# Altium PCB 无线小样.PcbDoc
Units mm, origin at the board's own origin, x right, y up, seen from the top; angles counter-clockwise.
Board outline 31.75 x 22.48 mm, 4 copper layers (Top Layer, VCC, GND, Bottom Layer), stack 0.778 mm thick; 43 components, 30 nets, 165 pads, 43 vias.
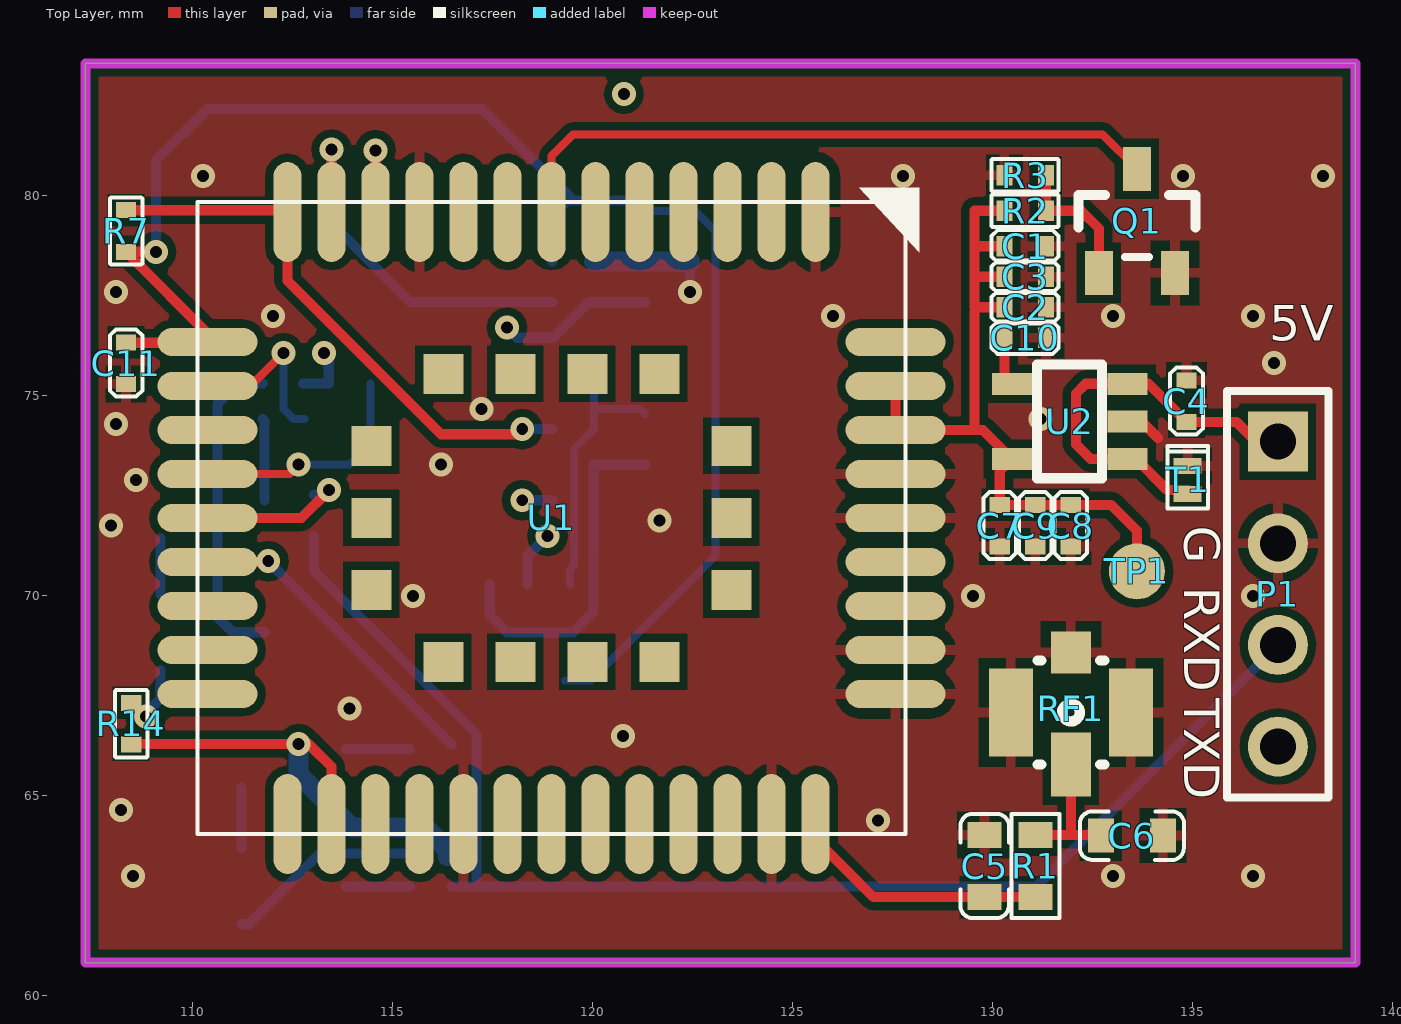
[diagram p0: Top Layer view]
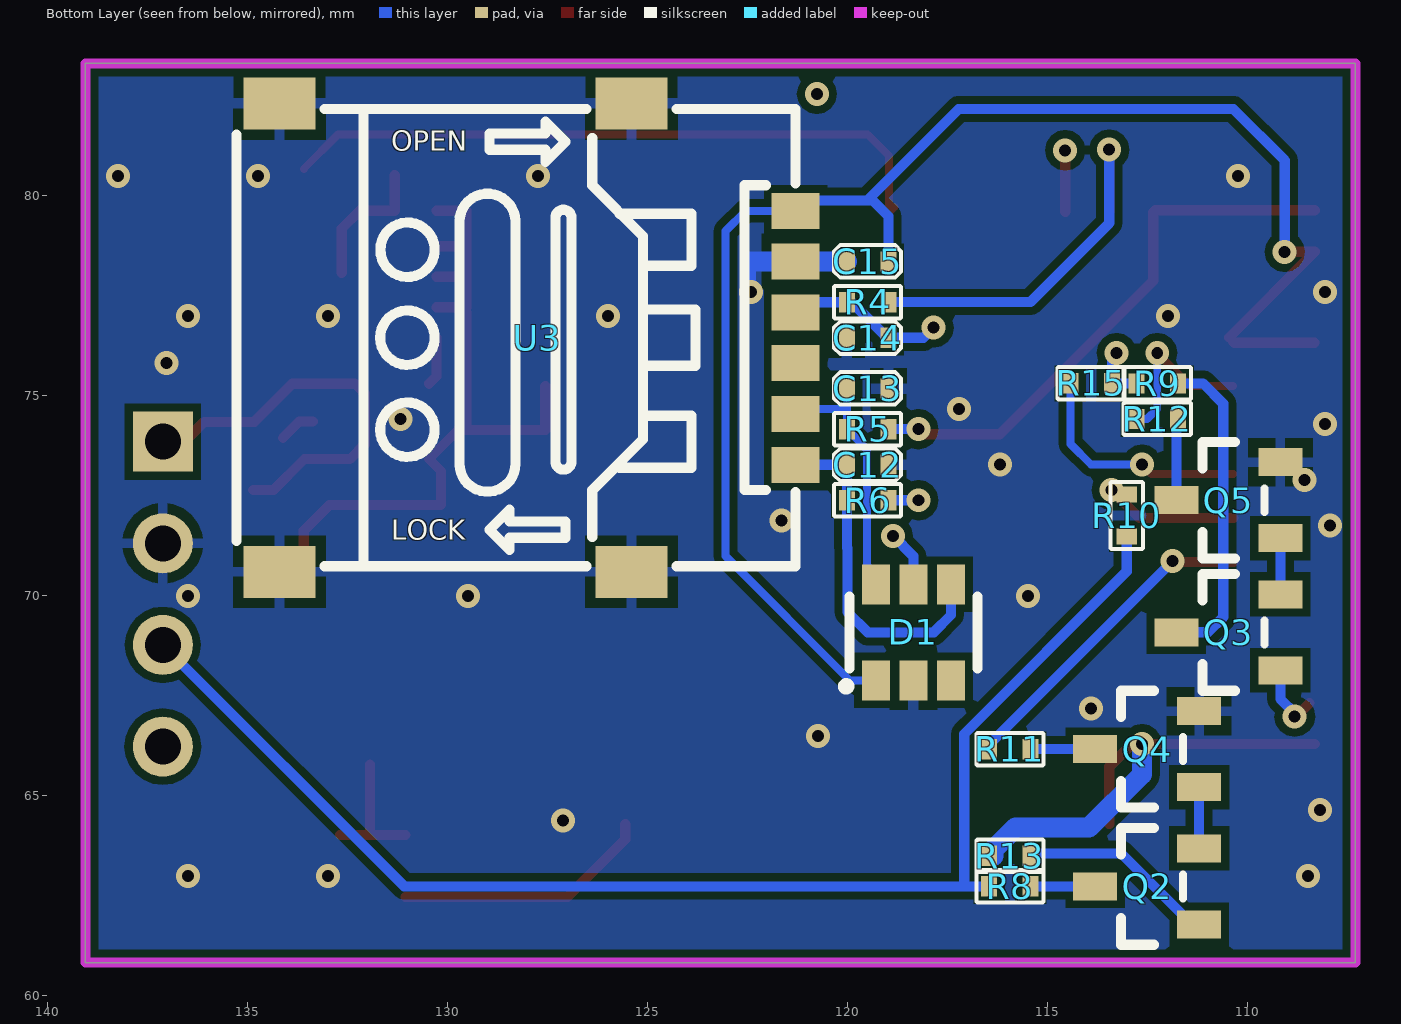
[diagram p1: Bottom Layer view, seen from below]
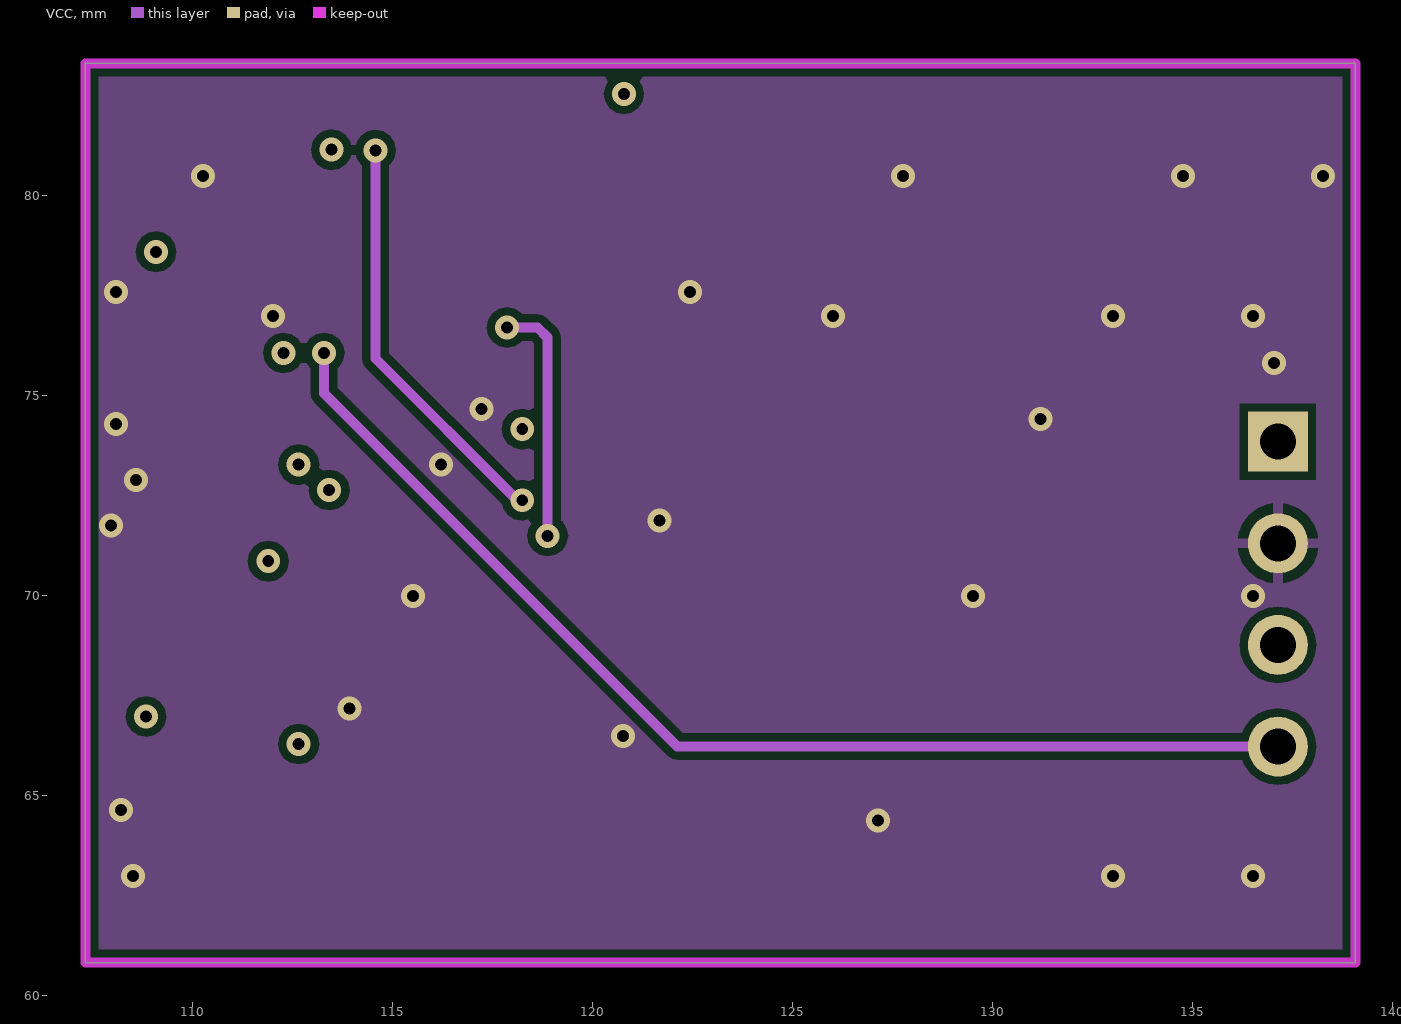
[diagram p2: VCC]
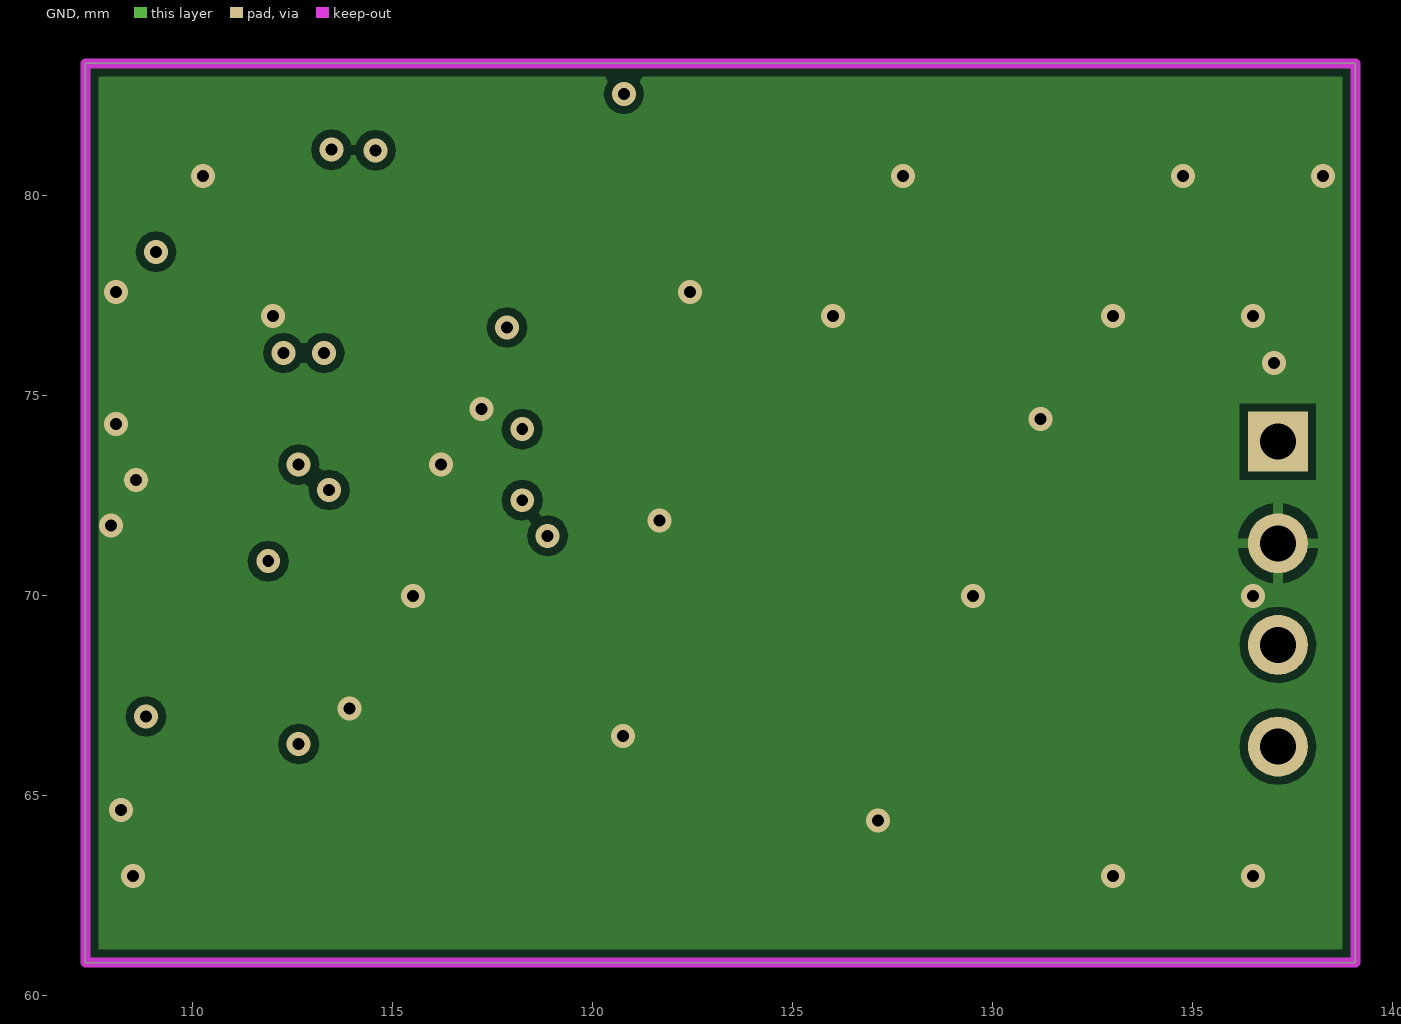
[diagram p3: GND]
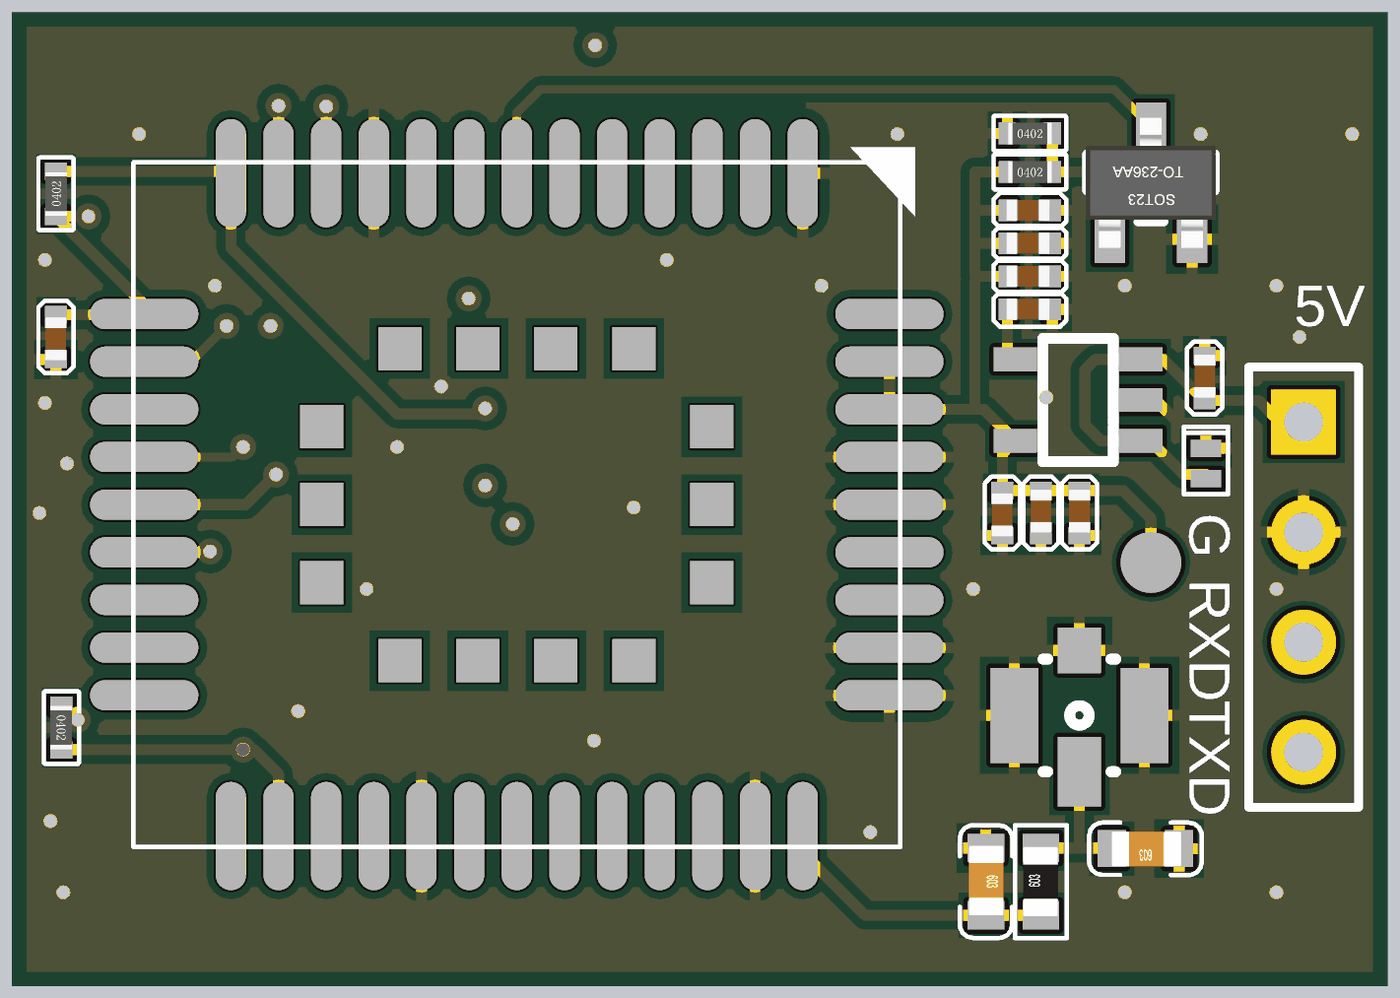
[diagram p4: 3D render of the assembled board from above, using the file's embedded part models]
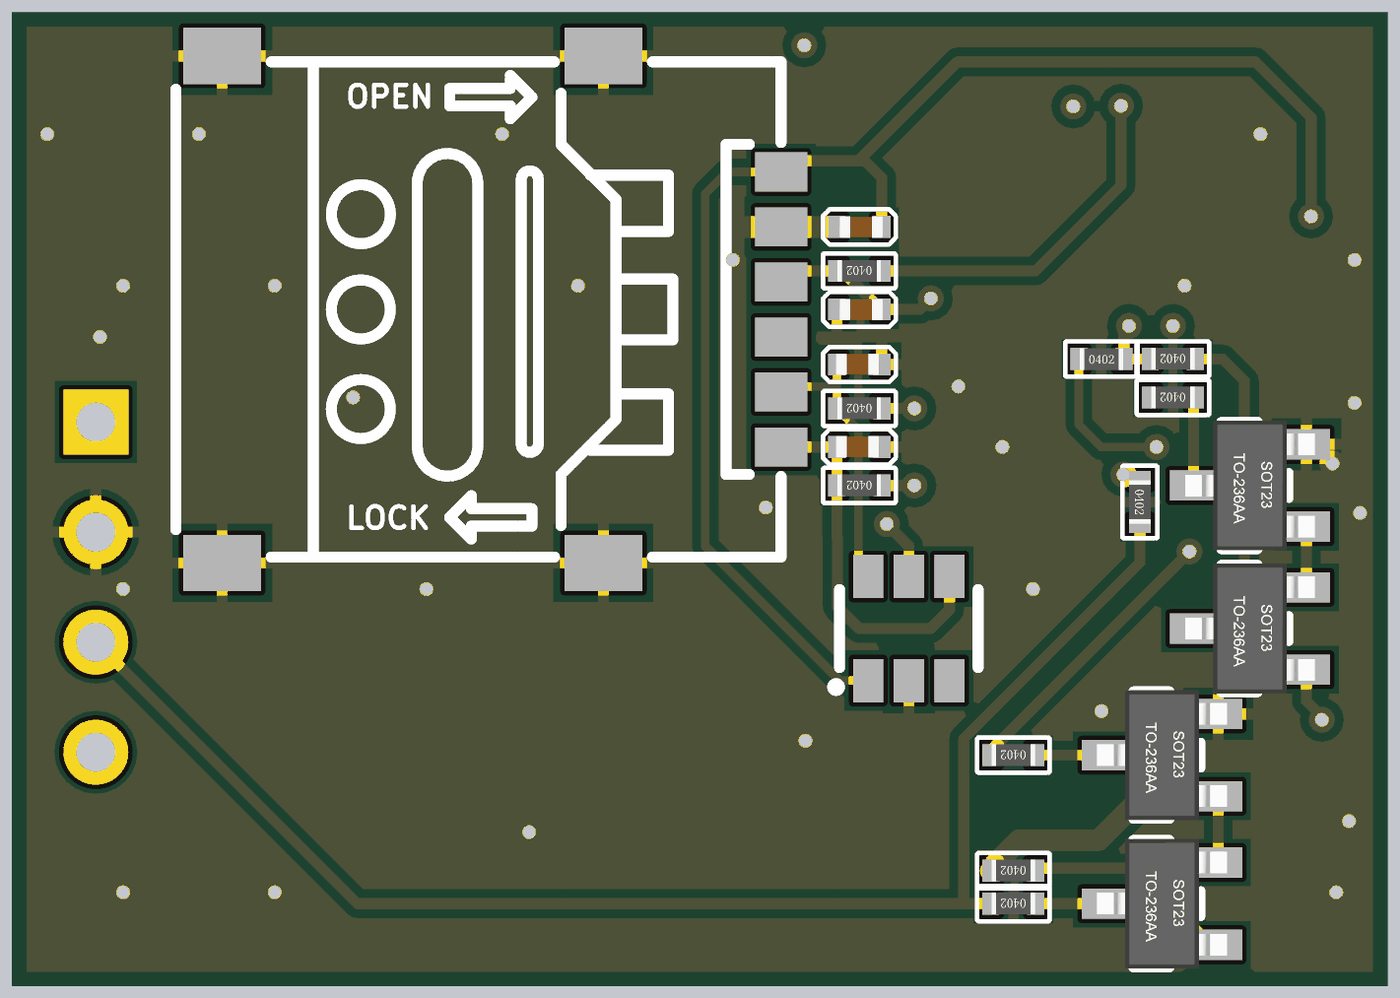
[diagram p5: 3D render of the assembled board from below, using the file's embedded part models]

## Layer stack, top to bottom
Top Solder: solder mask 0.0102, Solder Resist, Dk 3.5
Top Layer: signal copper 0.0356
Dielectric 1: core 0.254, FR-4, Dk 4.2
VCC: signal copper 0.036
Dielectric 3: prepreg 0.127, Dk 4.2
GND: signal copper 0.036
Dielectric 2: core 0.254, Dk 4.2
Bottom Layer: signal copper 0.0356
Bottom Solder: solder mask 0.0102, Solder Resist, Dk 3.5

## Board outline
107.315,60.833 107.315,83.312 139.065,83.312 139.065,60.833

## Design rules (kind name [scope] priority, off if disabled: settings)
Clearance [All] p1: gap=0.2
PolygonConnect PolygonConnect_1 [Isvia] p1: connectstyle=Direct reliefconductorwidth=0.254 reliefentries=4 polygonreliefangle="90 Angle" airgapwidth=0.254
PolygonConnect [All] p2: connectstyle=Relief reliefconductorwidth=0.254 reliefentries=4 polygonreliefangle="90 Angle" airgapwidth=0.254
RoutingVias [All] p1: holewidth=0.711 width=1.27 viastyle="Through Hole" minholewidth=0.711 minwidth=1.27 maxholewidth=0.711 maxwidth=1.27
SolderMaskExpansion [All] p1: expansion=0.102
Width [All] p1: maxlimit=5 minlimit=0.2 preferedwidth=0.254
30 further rules are at their usual default settings.

## Components (designator, comment, footprint, x,y, rotation, side; value= is the part's Value field where it differs from the comment)
C1 "100nF" 0402C 130.81,78.74 r180 top
C2 "100pF" 0402C 130.81,77.216 r180 top
C3 "22pF" 0402C 130.81,77.978 r180 top
C4 "100nF" 0402C 134.843,74.869 r90 top
C5 "NC" 0603C 129.794,63.246 r270 top
C6 "NC" 0603C 133.477,64.008 r180 top
C7 "47uF/6.3V/Tan" 0402C 130.175,71.755 r270 top
C8 "100nF" 0402C 131.953,71.755 r90 top
C9 "22pF" 0402C 131.064,71.755 r90 top
C10 "100nF" 0402C 130.81,76.454 r180 top
C11 "100nF" 0402C 108.331,75.819 r270 top
C12 "33pF" 0402C 119.507,73.279 r0 bottom
C13 "33pF" 0402C 119.507,75.184 r0 bottom
C14 "33pF" 0402C 119.507,76.454 r180 bottom
C15 "33pF" 0402C 119.507,78.359 r180 bottom
D1 "SMS05CT1G" TSOP-6_L3.0-W1.5-P0.95-LS2.8-BL 118.364,69.088 r180 bottom
P1 "接口" HDR1X4 137.129,73.853 r270 top
Q1 "S8050-J3Y" SOT23 133.604,79.375 r270 top
Q2 "S8050-J3Y" SOT23 112.522,62.738 r180 bottom
Q3 "S8050-J3Y" SOT23 110.49,69.088 r180 bottom
Q4 "S8050-J3Y" SOT23 112.522,66.167 r180 bottom
Q5 "S8050-J3Y" SOT23 110.49,72.39 r180 bottom
R1 "0R" 0603R 131.064,63.246 r90 top
R2 "4.7K" 0402R 130.81,79.629 r0 top
R3 "47K" 0402R 130.81,80.518 r0 top
R4 "22R" 0402R 119.507,77.343 r0 bottom
R5 "22R" 0402R 119.507,74.168 r0 bottom
R6 "22R" 0402R 119.507,72.39 r0 bottom
R7 "10K" 0402R 108.331,79.121 r90 top
R8 "4.7K" 0402R 115.951,62.738 r0 bottom
R9 "4.7K" 0402R 112.268,75.311 r0 bottom
R10 "0R" 0402R 113.03,72.009 r270 bottom
R11 "1K" 0402R 115.951,66.167 r0 bottom
R12 "1K" 0402R 112.268,74.422 r0 bottom
R13 "4.7K" 0402R 115.951,63.5 r0 bottom
R14 "4.7K" 0402R 108.458,66.802 r270 top
R15 "0R" 0402R 113.919,75.311 r180 bottom
RF1 "73412-0110" ANT-SMD_73412-0110 131.953,67.183 r0 top
T1 "PESD12VV1BL-N" X1-DFN1006-2_L1.0-W0.6-RD 134.874,72.898 r270 top
TP1 "Testpoint" TP 133.604,70.612 r0 top
U1 "BC26" BC26 118.968,71.948 r270 top
U2 "LP2985-33DBVR" SOT-23-5 131.922,74.361 r90 top
U3 "Nano_sim" SIM-SMD_C77877 127.762,76.454 r180 bottom

## Footprints (in the part's own frame and the unit in brackets; to place one, negate y for a bottom-side part, rotate by r counter-clockwise, add the part's x,y. Pads: shape width x height; smd on the part's side, far side on the other; paste and mask are expansions set on the pad)
0402C [mm]
  rect 0.4x0.508 smd: 1(-0.52,0) 2(0.52,0)
  silkscreen extent -0.84,-0.41 0.84,0.41, body extent -0.46,-0.25 0.54,0.25, height 0.5
0402R [mm]
  rect 0.4x0.508 smd: 1(-0.52,0) 2(0.52,0)
  silkscreen extent -0.84,-0.41 0.84,0.41, body extent -0.5,-0.25 0.5,0.25, height 0.35
0603C [mm]
  rect 0.65x0.85 smd: 1(-0.776,0) 2(0.776,0)
  silkscreen extent -1.3,-0.6 1.3,0.61, body extent -0.83,-0.39 0.77,0.41, height 0.3
0603R [mm]
  rect 0.65x0.85 smd: 1(-0.776,0) 2(0.776,0)
  silkscreen extent -1.3,-0.6 1.3,0.6, body extent -0.8,-0.39 0.8,0.41, height 0.3
ANT-SMD_73412-0110 [mm]
  rect 1.1x2.2 smd: 1(-1.5,-0.1) 3(1.5,-0.1)
  rect 1x1.6 smd: 2(0,-1.4)
  rect 1x1.05 smd: 4(0,1.4)
  silkscreen extent -0.84,-1.4 0.84,1.2
BC26 [mm]
  oval 2.5x0.7 smd mask+0.05: 1(-7.65,6.6) 2(-7.65,5.5) 3(-7.65,4.4) 4(-7.65,3.3) 5(-7.65,2.2) 6(-7.65,1.1) 7(-7.65,0) 8(-7.65,-1.1) 9(-7.65,-2.2) 10(-7.65,-3.3) 11(-7.65,-4.4) 12(-7.65,-5.5) 13(-7.65,-6.6) 23(7.65,-6.6) 24(7.65,-5.5) 25(7.65,-4.4) 26(7.65,-3.3) 27(7.65,-2.2) 28(7.65,-1.1) 29(7.65,0) 30(7.65,1.1) 31(7.65,2.2) 32(7.65,3.3) 33(7.65,4.4) 34(7.65,5.5) 35(7.65,6.6)
  oval 0.7x2.5 smd mask+0.05: 14(-4.4,-8.6) 15(-3.3,-8.6) 16(-2.2,-8.6) 17(-1.1,-8.6) 18(0,-8.6) 19(1.1,-8.6) 20(2.2,-8.6) 21(3.3,-8.6) 22(4.4,-8.6) 36(4.4,8.6) 37(3.3,8.6) 38(2.2,8.6) 39(1.1,8.6) 40(0,8.6) 41(-1.1,8.6) 42(-2.2,8.6) 43(-3.3,8.6) 44(-4.4,8.6)
  rect 1x1 smd mask+0.05: 45(-3.6,2.7) 46(-3.6,0.9) 47(-3.6,-0.9) 48(-3.6,-2.7) 49(-1.8,-4.5) 50(0,-4.5) 51(1.8,-4.5) 52(3.6,-2.7) 53(3.6,-0.9) 54(3.6,0.9) 55(3.6,2.7) 56(1.8,4.5) 57(0,4.5) 58(-1.8,4.5)
  silkscreen extent -8.25,-8.85 7.9,9.2
HDR1X4 [mm] "Connector; Header; 4 Position"
  rect 1.5x1.5 hole 0.9: 1(0,0)
  round 1.5 hole 0.9: 2(2.54,0) 3(5.08,0) 4(7.62,0)
  silkscreen extent -1.27,-1.27 8.89,1.27
SIM-SMD_C77877 [mm]
  rect 1.8x1.3 smd: 0(-6.451,-5.853) 0(-6.451,5.853) 0(2.349,-5.853) 0(2.349,5.853)
  rect 1.2x0.9 smd: 1(6.451,3.173) 2(6.451,0.633) 3(6.451,-1.907) 5(6.451,1.903) 6(6.451,-0.637) 7(6.451,-3.177)
  silkscreen extent -7.52,-5.72 6.45,5.72
SOT23 [mm]
  rect 1.1x0.7 smd: 1(1.301,-0.95) 2(1.301,0.95) 3(-1.301,0)
  silkscreen extent -0.65,-1.46 0.9,1.46, body extent -1.5,-1.5 1.5,1.5, height 1.3
SOT-23-5 [mm]
  rect 0.551x1 smd: 1(-0.94,-1.448) 2(0,-1.448) 3(0.94,-1.448) 4(0.94,1.448) 5(-0.94,1.448)
  silkscreen extent -1.42,-0.81 1.42,0.81
TP [mm]
  round 1.4 smd: 1(0,0)
TSOP-6_L3.0-W1.5-P0.95-LS2.8-BL [mm]
  rect 0.7x1 smd: 1(-0.94,-1.2) 2(0,-1.2) 3(0.94,-1.2) 4(0.94,1.2) 5(0,1.2) 6(-0.94,1.2)
  silkscreen extent -1.76,-1.43 1.6,0.9
X1-DFN1006-2_L1.0-W0.6-RD [mm]
  rect 0.4x0.7 smd: 1(-0.35,0) 2(0.35,0)
  silkscreen extent -0.85,-0.51 0.71,0.51

## Part data
C1 C2 C3 C4 C5 C6 C8 C9 C10 C11 C12 C13 C14 C15: library part Cap, "Capacitor"
C7: library part "Cap Pol1", "Polarized Capacitor (Radial)"
P1: library part "Header 4", "Header, 4-Pin"
R1 R2 R3 R4 R5 R6 R7 R8 R9 R10 R11 R12 R13 R14 R15: library part Res1, "Resistor"
T1: library part TVS2
U2: library part SGM2019

## Via types
v1: diameter 0.6, hole 0.3, Top Layer to Bottom Layer, tented both sides, 43 vias

## Nets (pads, with @x,y where several pads share a name; then routed paths per layer and width w, separated by ;. In a path a pad name is that pad's centre, name@x,y a point inside that pad or via, vN(x,y) a via of type N, cw(c..) or ccw(c..) an arc to the next point about the centre after c; other vN are vias at no path point)
D_5V: C4.1 P1.1 T1.2 U2.1 U2.3 | length 10.3
  Top Layer w0.254: T1.2@134.874,72.644 134.366,72.644 133.589,73.421 U2.1 132.446,73.421 132.08,73.787 132.08,75.057 132.324,75.301 U2.3 133.891,75.301 C4.1 136.09,74.349 136.586,73.853 P1.1
GND: C1.1 C2.1 C3.1 C4.2 C5.1 C6.1 C7.2 C8.1 C9.1 C10.1 C11.2 C12.1 C13.1 C14.1 C15.1 D1.2 P1.2 Q1.2 Q4.2 Q5.2 R3.1 RF1.1 RF1.3 RF1.4 T1.1 U1.1 U1.10 U1.27 U1.34 U1.36 U1.37 U1.40 U1.41 U2.2 U3.0 U3.5 | length 4.1
  Top Layer w0.254: U2.2 133.712,74.361 134.124,73.949
  Bottom Layer w0.254: v1(122.428,77.597) 122.428,78.357
  Bottom Layer w0.5: C15.1@120.027,78.357 120.348,78.357 120.99,78.357 U3.5 122.428,78.357
  other v1: 108.5,63 133,63 136.5,63 127.127,64.389 108.204,64.643 120.75,66.5 113.919,67.183 115.5,70 129.5,70 136.5,70 107.95,71.755 121.666,71.882 108.585,72.898 116.205,73.279 108.077,74.295 131.191,74.422 117.221,74.676 137.033,75.819 112,77 126,77 133,77 136.5,77 108.077,77.597 110.25,80.5 127.75,80.5 134.75,80.5 138.25,80.5
NetC5_2: C5.2 R1.1 U1.35 | length 6.5
  Top Layer w0.254: U1.35 125.568,63.916 127.014,62.47 C5.2 R1.1
NetC10_2: C10.2 U2.4 | length 1.2
  Top Layer w0.254: C10.2 130.29,75.485 U2.4
NetC12_2: C12.2 D1.4 R6.2 U3.7 | length 10.9
  Bottom Layer w0.254: D1.4 117.424,69.52 117.856,69.088 119.507,69.088 120.015,69.596 120.015,71.192 120.026,71.203 120.026,73.277 U3.7 121.31,73.279 C12.2 R6.2
NetC13_2: C13.2 D1.6 R5.2 U3.3 | length 6.4
  Bottom Layer w0.2: D1.6@119.431,70.288 119.431,70.663 119.527,70.759 119.527,73.657 119.599,73.729 119.599,73.74 R5.2 120.027,74.676 ; C13.2@120.027,75.057 120.027,74.676 ; U3.3 121.183,74.676 120.027,74.676
NetC14_2: C14.2 D1.5 R4.2 U3.2 | length 11.4
  VCC w0.254: v1(117.856,76.708) 118.618,76.708 118.872,76.454 v1(118.872,71.501)
  Bottom Layer w0.254: v1(117.856,76.708) 118.11,76.454 C14.2 119.014,76.454 119.902,77.341 U3.2@121.311,77.341 ; D1.5 118.364,70.993 v1(118.872,71.501)
NetQ1_1: Q1.1 R2.2 R3.2 | length 3.5
  Top Layer w0.254: R3.2 R2.2 132.207,79.629 132.654,79.182 Q1.1
NetQ1_3: Q1.3 U1.7 | length 16.8
  Top Layer w0.2: U1.7@118.841,79.725 U1.7 118.968,80.995 119.507,81.534 132.746,81.534 Q1.3
NetQ2_1: Q2.1 R13.1 | length 5
  Bottom Layer w0.254: Q2.1 111.399,61.788 113.169,63.558 115.373,63.558 R13.1
NetQ2_2: Q2.2 Q4.1 | length 1.5
  Bottom Layer w0.254: Q2.2 Q4.1
NetQ2_3: Q2.3 R8.1 | length 1.6
  Bottom Layer w0.254: Q2.3 R8.1
NetQ3_1: Q3.1 R14.1 | length 1.9
  Top Layer w0.254: R14.1 108.832,66.948 v1(108.832,66.982)
  Bottom Layer w0.254: v1(108.832,66.982) 108.832,67.063 109.189,67.42 Q3.1
NetQ3_2: Q3.2 Q5.1 | length 1.4
  Bottom Layer w0.254: Q3.2 Q5.1
NetQ3_3: Q3.3 R9.1 | length 8
  Bottom Layer w0.254: R9.1 111.125,75.311 110.617,74.803 110.617,69.469 110.998,69.088 Q3.3
NetQ4_3: Q4.3 R11.1 | length 1.6
  Bottom Layer w0.254: Q4.3 R11.1
NetQ5_3: Q5.3 R12.1 | length 2
  Bottom Layer w0.254: R12.1 111.791,74.379 Q5.3
NetR10_1: R10.1 U1.18 | length 3.8
  Top Layer w0.254: U1.18 112.715,71.948 v1(113.411,72.644)
  Bottom Layer w0.254: R10.1 113.296,72.529 v1(113.411,72.644)
NetR15_1: R15.1 U1.17 | length 5.9
  Top Layer w0.2: U1.17 112.418,73.048 v1(112.649,73.279)
  Bottom Layer w0.2: v1(112.649,73.279) 113.919,73.279 114.439,73.799 R15.1
PSM_EINT: R11.2 U1.19 | length 8
  Top Layer w0.254: U1.19@110.35,70.866 U1.19 111.869,70.848 v1(111.887,70.866)
  Bottom Layer w0.254: v1(111.887,70.866) R11.2@116.471,66.282
RESET: R12.2 U1.15 | length 4.3
  Top Layer w0.2: U1.15 111.443,75.248 v1(112.268,76.073)
  Bottom Layer w0.2: v1(112.268,76.073) 112.268,74.676 112.522,74.422 R12.2
RF: C6.2 R1.2 RF1.2 | length 3.4
  Top Layer w0.254: R1.2 131.953,64.022 ; RF1.2 131.953,64.022 ; C6.2@132.701,64.022 131.953,64.022
RXD_MCU: P1.3 R8.2 R10.2 | length 33.6
  Bottom Layer w0.254: R10.2 113.03,70.612 117.094,66.548 117.094,62.738 ; R8.2 117.094,62.738 ; P1.3 131.094,62.738 117.094,62.738
SIM_CLK: R5.1 R7.2 U1.13 | length 14
  Top Layer w0.254: R7.2 112.325,79.641 U1.13 112.368,77.878 116.205,74.041 118.11,74.041 v1(118.237,74.168)
  Bottom Layer w0.254: v1(118.237,74.168) R5.1
SIM_DATA: R6.1 U1.11 | length 12.6
  Top Layer w0.254: U1.11 v1(114.568,81.139)
  VCC w0.254: v1(114.568,81.139) 114.568,75.932 118.11,72.39 v1(118.237,72.39)
  Bottom Layer w0.254: v1(118.237,72.39) R6.1
SIM_RST: R4.1 U1.12 | length 9.7
  Top Layer w0.254: U1.12 v1(113.468,81.153)
  Bottom Layer w0.254: v1(113.468,81.153) 113.468,79.318 115.443,77.343 R4.1
SIM_VDD: C11.1 C15.2 D1.1 R7.1 U1.14 U3.1 | length 39.2
  Top Layer w0.254: C11.1@108.343,76.327 110.347,76.327 U1.14 ; v1(109.081,78.601) R7.1 U1.14@110.476,76.456
  Bottom Layer w0.2: D1.1 119.958,67.888 123.063,70.993 123.063,79.121 122.557,79.627 U3.1
  Bottom Layer w0.254: v1(109.081,78.601) 109.081,80.887 110.363,82.169 117.235,82.169 119.521,79.883 119.888,79.883 ; C15.2 118.987,79.49 119.38,79.883 121.056,79.883 U3.1
TXD_MCU: P1.4 R9.2 R15.2 | length 30
  VCC w0.254: v1(113.284,76.073) 113.284,75.059 122.11,66.233 P1.4
  Bottom Layer w0.254: R9.2@112.761,75.311 R9.2 R15.2 113.399,75.958 v1(113.284,76.073)
VCC: C1.2 C2.2 C3.2 C7.1 C8.2 C9.2 R2.1 TP1.1 U1.42 U1.43 U2.5 | length 18.6
  Top Layer w0.254: U1.43 U1.42 129.54,74.148 ; 129.54,77.089 129.54,74.148 ; C2.2 129.54,77.216 129.54,77.978 ; C3.2 129.54,77.978 ; C1.2 129.54,78.74 ; R2.1 129.54,79.629 129.54,78.74 ; TP1.1 133.604,71.628 132.957,72.275 C8.2 C9.2 C7.1 130.175,73.122 U2.5 129.748,74.148 129.54,74.148 ; 129.54,77.978 129.54,78.74
VDD_EXT: R13.2 R14.2 U1.24 | length 12.3
  Top Layer w0.254: R14.2@108.331,66.294 112.903,66.294 113.468,65.729 U1.24
  Bottom Layer w0.5: v1(112.649,66.294) 112.649,65.532 113.977,64.204 115.817,64.204 116.367,63.654 116.367,63.5 R13.2
pads on no net: D1.3 U1.2 U1.3 U1.4 U1.5 U1.6 U1.8 U1.9 U1.16 U1.20 U1.21 U1.22 U1.23 U1.25 U1.26 U1.28 U1.29 U1.30 U1.31 U1.32 U1.33 U1.38 U1.39 U1.44 U1.45 U1.46 U1.47 U1.48 U1.49 U1.50 U1.51 U1.52 U1.53 U1.54 U1.55 U1.56 U1.57 U1.58 U3.6
copper on no net:
  other v1: 120.777,82.55

## Polygon pours and split planes (outlines as drawn)
GND on Top Layer "Top Layer-No Net" (solid, remove dead copper, pour order 22): 107.061,83.693 106.934,83.566 106.934,60.452 139.319,60.452 139.573,60.706 139.446,60.833 139.446,83.82 107.188,83.82 107.061,83.693
GND on VCC "Top Layer-No Net" (solid, remove dead copper, pour order 24): 107.061,83.566 107.061,60.579 139.446,60.579 139.192,60.833 139.192,83.693 107.315,83.693 107.061,83.439
GND on GND "Top Layer-No Net" (solid, remove dead copper, pour order 26): 107.061,83.566 107.061,60.579 139.319,60.579 139.446,60.706 139.192,60.96 139.192,83.693 107.442,83.693 107.061,83.312
GND on Bottom Layer "Top Layer-No Net" (solid, remove dead copper, pour order 28): 107.061,83.693 107.188,83.566 107.188,60.452 139.192,60.452 139.446,60.706 139.319,60.833 139.319,83.693 107.188,83.693 107.061,83.566

## Keep-outs
Keep-Out Layer:
  the board outline again, w0.254

## Silkscreen, mask and mechanical layers (free items; w line width, h text height)
Top Overlay:
  text "5V" at 136.906,76.073 h1.52
  text "G" at 134.493,71.755 h1.52 r270
  text "RXD" at 134.493,70.231 h1.52 r270
  text "TXD" at 134.493,67.437 h1.52 r270

## Text inside footprints (layer, text, board x,y; h text height)
U3: Bottom Overlay "LOCK" at 131.413,71.404 h0.5; Bottom Overlay "OPEN" at 131.413,81.132 h0.5